# Altium PCB Board2.PcbDoc
Units mil, origin at the board's own origin, x right, y up, seen from the top; angles counter-clockwise.
Board outline 3500 x 3500 mil, 2 copper layers (Top Layer, Bottom Layer); 50 components, 31 nets, 162 pads, 34 vias.
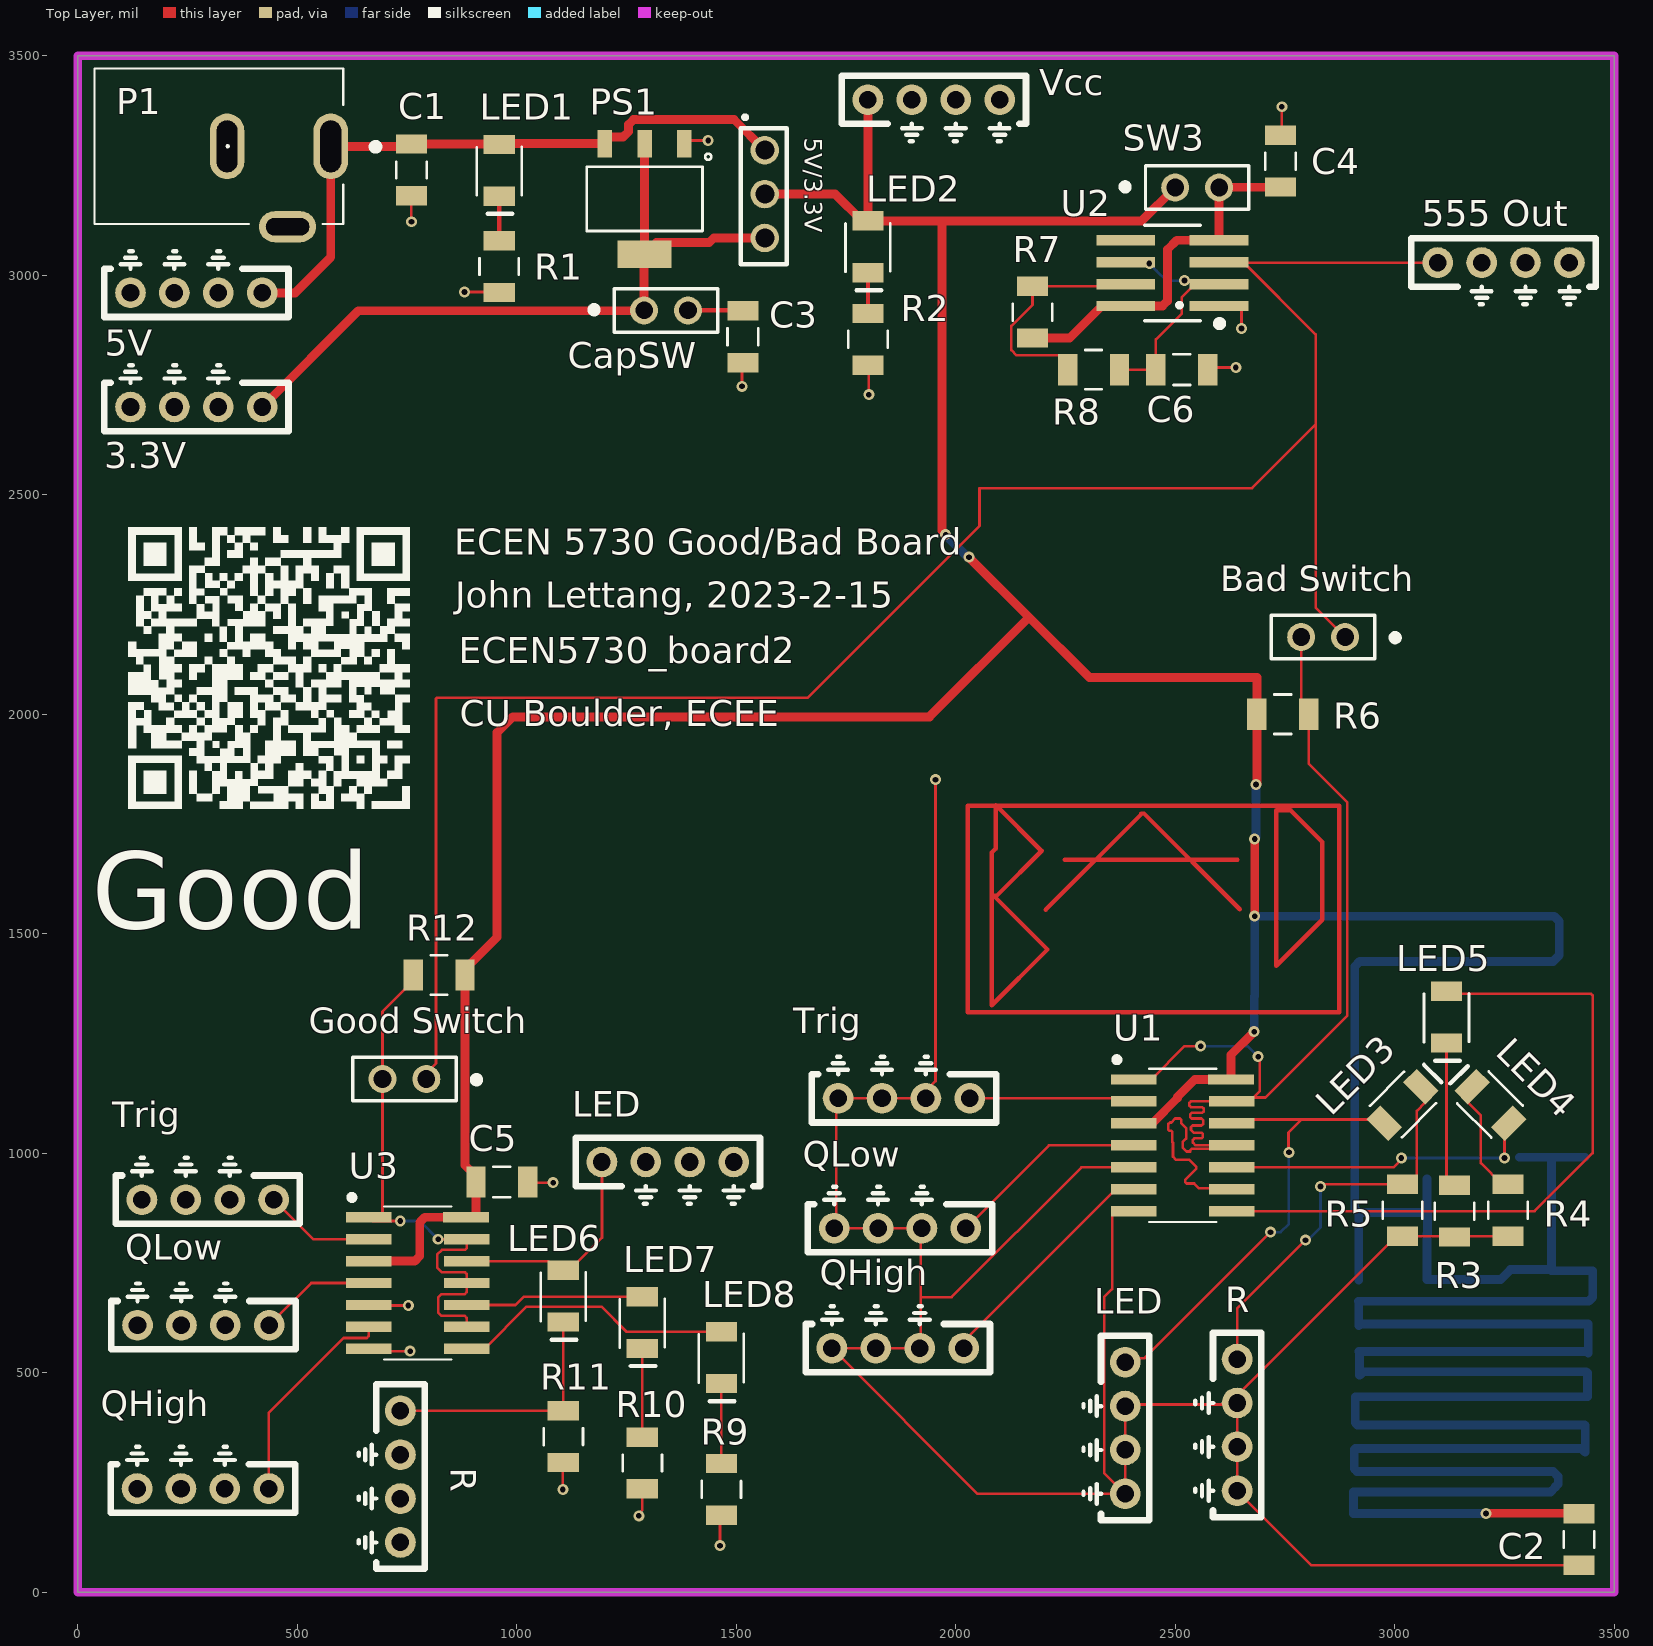
[diagram p0: Top Layer view]
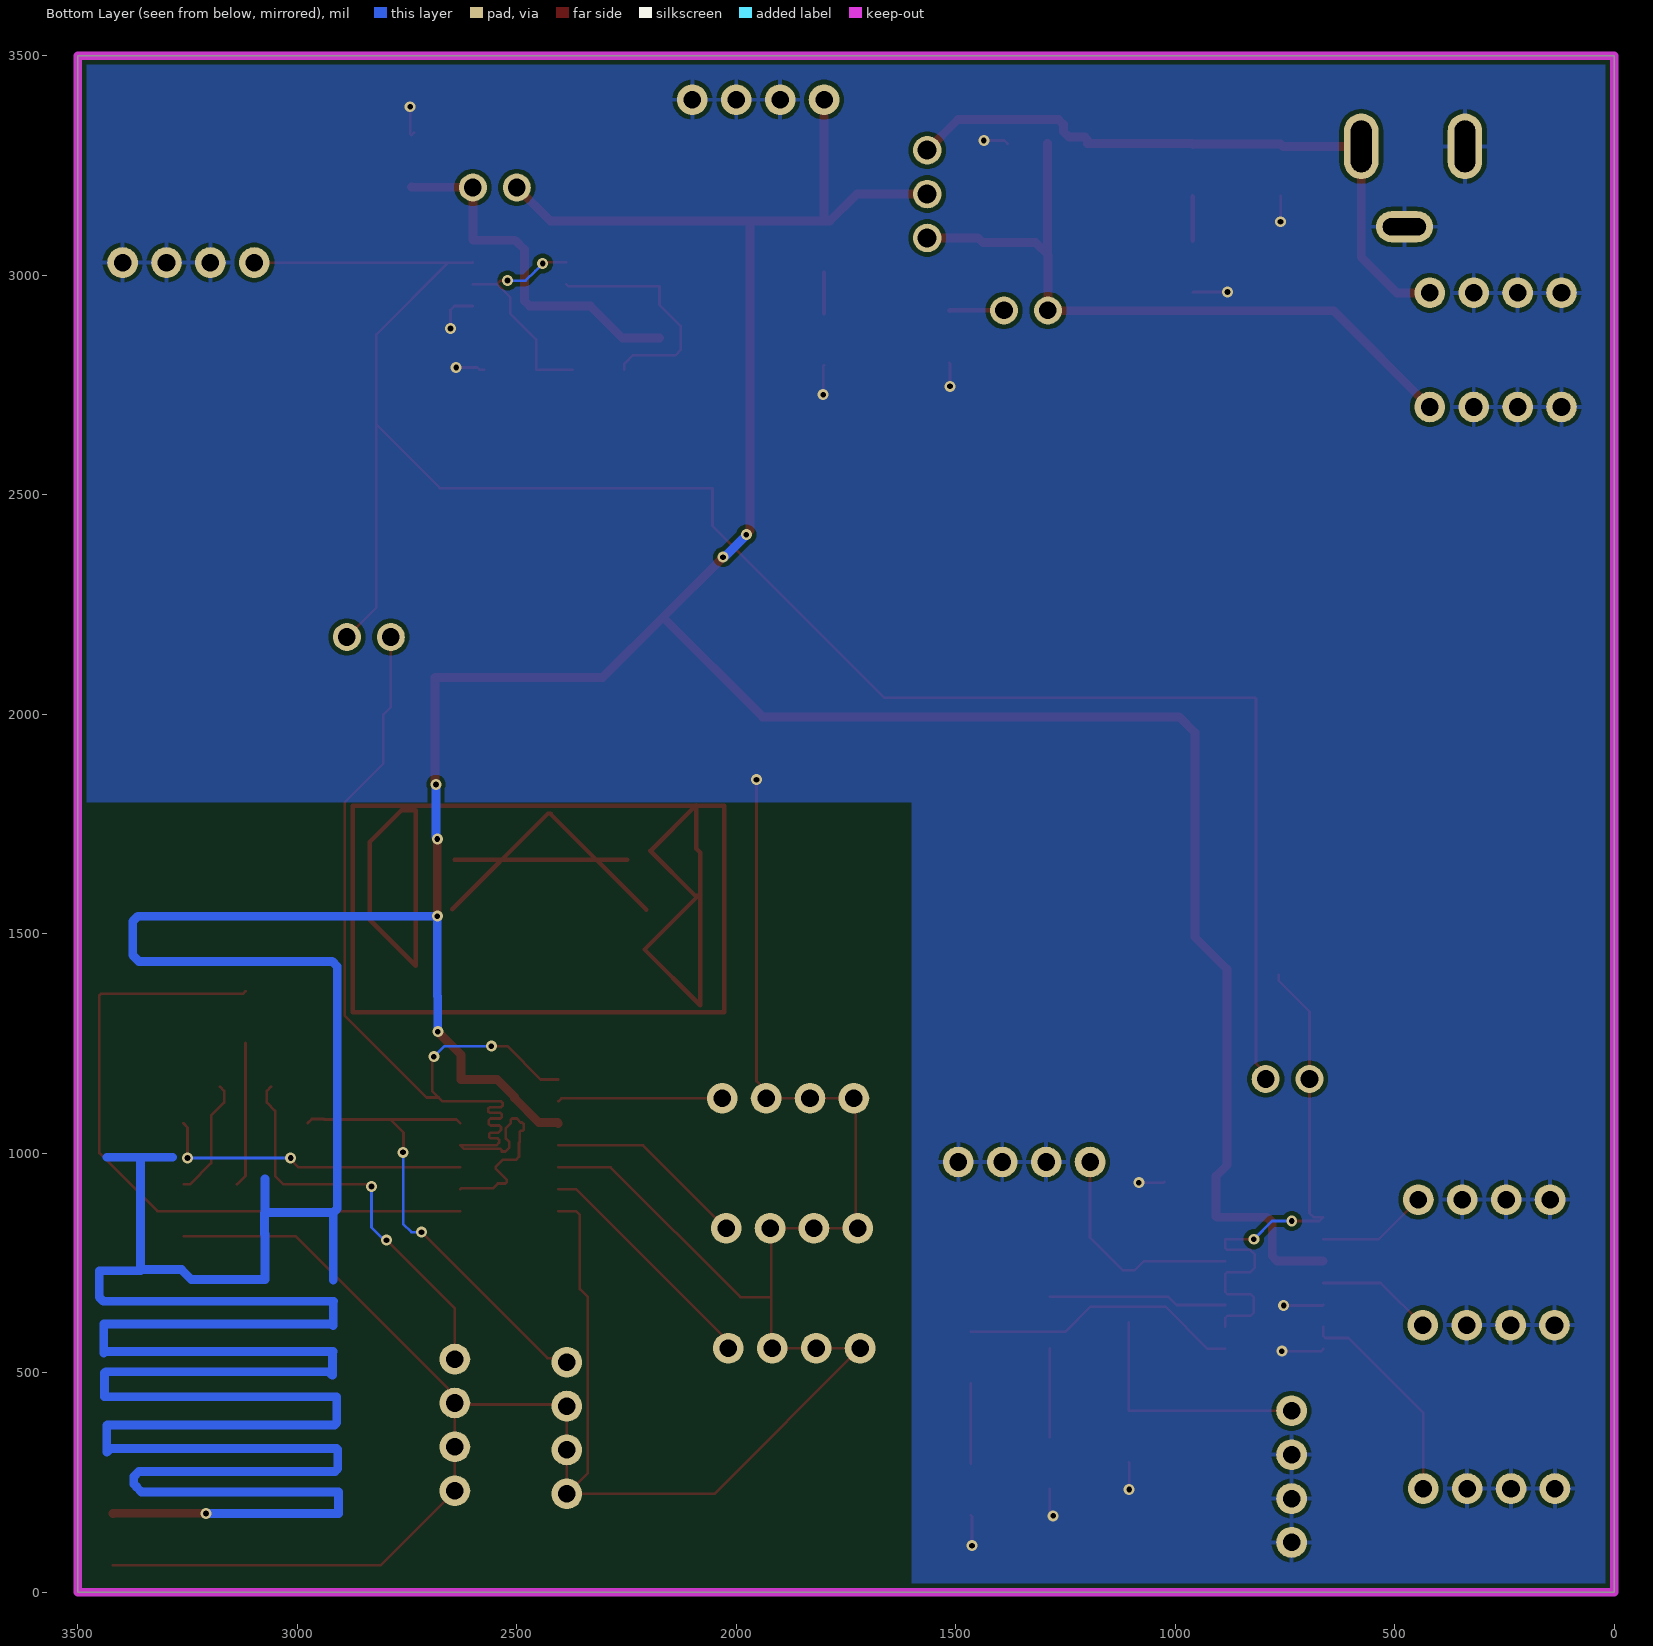
[diagram p1: Bottom Layer view, seen from below]
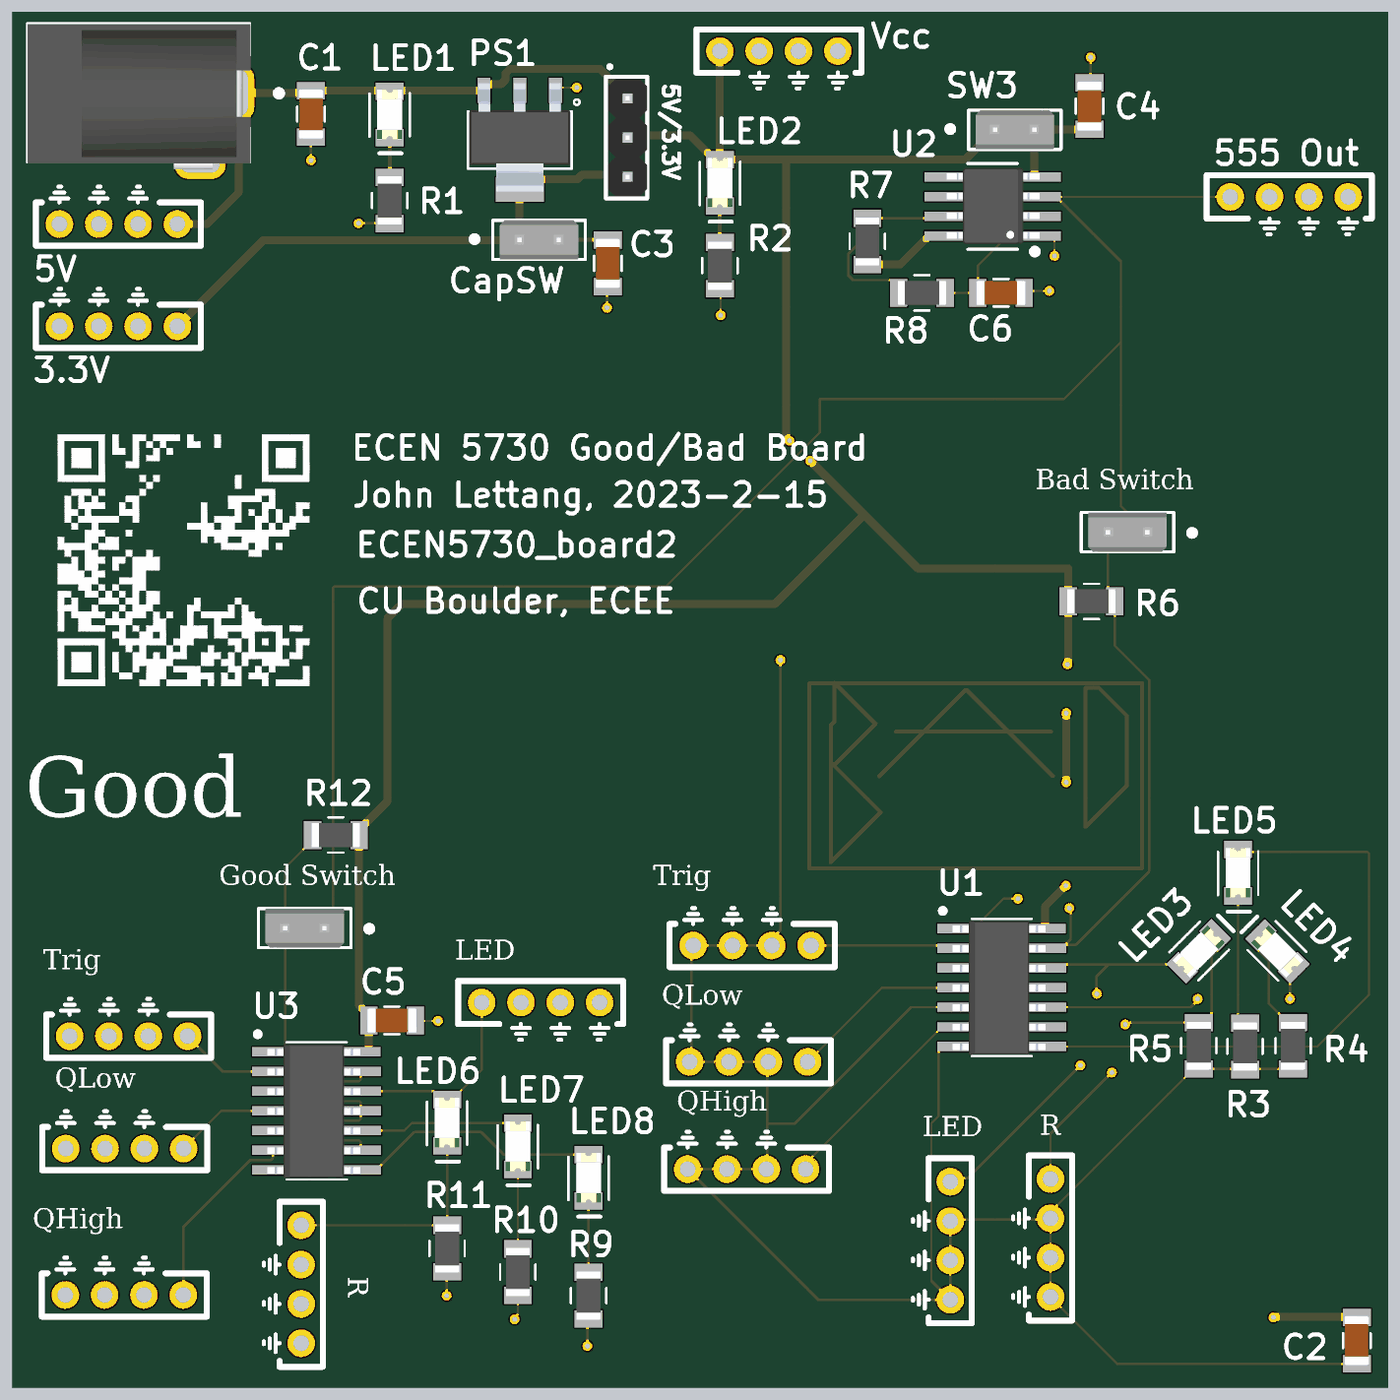
[diagram p2: 3D render of the assembled board from above, using the file's embedded part models]

## Layer stack, top to bottom
Top Solder: solder mask 0.4, Solder Resist, Dk 3.5
Top Layer: signal copper 1.4
Dielectric 1: dielectric 12.6, FR-4, Dk 4.8
Bottom Layer: signal copper 1.4
Bottom Solder: solder mask 0.4, Solder Resist, Dk 3.5

## Board outline
0,0 3500,0 3500,3500 0,3500

## Design rules (kind name [scope] priority, off if disabled: settings)
BoardOutlineClearance [All] p1: gap=10 ignorepadtopadclearanceinfootprint=FALSE except(0: Arc-SplitContinuation Track-SplitContinuation SMDPad-SplitContinuation THPad-SplitContinuation Via-SplitContinuation Fill-SplitContinuation Poly-SplitContinuation Region-SplitContinuation Text-SplitContinuation)
Clearance Clearance_1 [All] p1: gap=10 ignorepadtopadclearanceinfootprint=FALSE except(0: Arc-Hole Track-Hole SMDPad-Hole THPad-Hole Via-Hole Fill-Hole Poly-Hole Region-Hole Text-Hole)
Clearance [All] p2: gap=10 ignorepadtopadclearanceinfootprint=FALSE except(0: Arc-Hole Track-Hole SMDPad-Hole THPad-Hole Via-Hole Fill-Hole Poly-Hole Region-Hole Text-Hole)
PlaneConnect [All] p1: pad.planeconnectstyle=Direct pad.reliefexpansion=20 pad.reliefentries=4 pad.reliefconductorwidth=10 pad.reliefairgap=10 via.planeconnectstyle=Relief via.reliefexpansion=20 via.reliefentries=4 via.reliefconductorwidth=10 via.reliefairgap=10
PolygonConnect [All] p1: thpad.connectstyle=Relief thpad.reliefconductorwidth=10 thpad.reliefentries=4 thpad.polygonreliefangle="90 Angle" thpad.airgapwidth=10 smdpad.connectstyle=Direct smdpad.reliefconductorwidth=10 smdpad.reliefentries=4 smdpad.polygonreliefangle="90 Angle" smdpad.airgapwidth=10 via.connectstyle=Direct via.reliefconductorwidth=10 via.reliefentries=4 via.polygonreliefangle="90 Angle" via.airgapwidth=10
RoutingVias [All] p1: holewidth=13 width=25 viastyle="Through Hole" minholewidth=13 minwidth=25 maxholewidth=28 maxwidth=80
SolderMaskExpansion [All] p1: expansion=4 istentingtop=FALSE
Width "Schematic Width Constraint_4" [InNet('+5')] p1: maxlimit=100 minlimit=10 preferedwidth=20 minimp=50.000000 maximp=50.000000 favimp=50.000000
Width "Schematic Width Constraint_3" [InNet('+3.3')] p2: maxlimit=100 minlimit=10 preferedwidth=20 minimp=50.000000 maximp=50.000000 favimp=50.000000
Width "Schematic Width Constraint_2" [InNet('NetC3_2')] p3: maxlimit=100 minlimit=10 preferedwidth=20 minimp=50.000000 maximp=50.000000 favimp=50.000000
Width "Schematic Width Constraint_1" [InNet('5V 555')] p4: maxlimit=100 minlimit=10 preferedwidth=20 minimp=50.000000 maximp=50.000000 favimp=50.000000
Width "Schematic Width Constraint" [InNet('Vcc')] p5: maxlimit=100 minlimit=10 preferedwidth=20 minimp=50.000000 maximp=50.000000 favimp=50.000000
Width [All] p6: maxlimit=20 minlimit=6 preferedwidth=6 minimp=50.000000 maximp=50.000000 favimp=50.000000
29 further rules are at their usual default settings.

## Classes and differential pairs
component class Board2: 3.3V 5V/3.3V "555 Out" "Bad Switch" C1 C2 C3 C4 C5 C6 CapSW "Good Switch" LED LED1 LED2 LED3 LED4 LED5 LED6 LED7 LED8 P1 PS1 QHigh QLow R R1 R2 R3 R4 R5 R6 R7 R8 R9 R10 R11 R12 SW3 Trig U1 U2 U3 Vcc

## Components (designator, comment, footprint, x,y, rotation, side; value= is the part's Value field where it differs from the comment)
3.3V "5V" TP10x_Probe 270,2960 r180 top (schematic designator TP2)
5V "3.3V" TP10x_Probe 270,2700 r180 top (schematic designator TP6)
5V/3.3V "PREC003SAAN-RC" 3_PIN_100mil 1565,3285 r270 top value="CONN HEADER VERT 3POS 2.54MM" (schematic designator SW1)
"555 Out" "TP 555 Out" TP10x_Probe 3248,3029 r0 top (schematic designator TP12)
"Bad Switch" "SW" 2Pin-Header-Conn 2887,2176 r180 top (schematic designator SW4)
C1 "22uF" 1206_Passive_Capacitor 760,3240 r90 top
C2 "22uF" 1206_Passive_Capacitor 3420,120 r270 top
C3 "22uF" 1206_Passive_Capacitor 1515,2860 r90 top
C4 "22uF" 1206_Passive_Capacitor 2740,3260 r270 top
C5 "22uF" 1206_Passive_Capacitor 966,934.28 r0 top
C6 "1uF" 1206_Passive_Capacitor 2515,2785 r180 top
CapSW "SW_2Pin_100mil_Switch" 2Pin-Header-Conn 1290,2920 r0 top (schematic designator SW2)
"Good Switch" "SW" 2Pin-Header-Conn 794,1169 r180 top (schematic designator SW5)
LED "10x Probe TP" TP10x_Probe 1344,980 r0 top (schematic designator TP13)
LED "10x Probe TP" TP10x_Probe 2386,374 r270 top (schematic designator TP7)
LED1 "Red" LED_1206 960,3239 r270 top
LED2 "Red" LED_1206 1800,3065 r270 top
LED3 "Blue" LED_1206 3018,1110 r45 top
LED4 "Blue" LED_1206 3218,1110 r135 top
LED5 "Blue" LED_1206 3118,1310 r270 top
LED6 "Blue" LED_1206 1106,674.28 r270 top
LED7 "Blue" LED_1206 1286,614.28 r270 top
LED8 "Blue" LED_1206 1466,534.28 r270 top
P1 "Power Jack" Power_Jack 576.22,3293.7 r180 top value="CONN PWR JACK 2X5.5MM SOLDER"
PS1 "AMS1117-3.3" LDO 1291,3174 r180 top value="IC REG LINEAR 3.3V 800MA SOT223"
QHigh "10x Probe TP" TP10x_Probe 285,236 r180 top (schematic designator TP11)
QHigh "10x Probe TP" TP10x_Probe 1868,556 r180 top (schematic designator TP5)
QLow "10x Probe TP" TP10x_Probe 286,608.28 r180 top (schematic designator TP10)
QLow "10x Probe TP" TP10x_Probe 1873,829 r180 top (schematic designator TP3)
R "10x Probe TP" TP10x_Probe 735,263.28 r270 top (schematic designator TP15)
R "10x Probe TP" TP10x_Probe 2641,381 r270 top (schematic designator TP8)
R1 "1k" 1206_Passive_Resitor 960,3020 r90 top value="1K Ohm"
R2 "1k" 1206_Passive_Resitor 1800,2854 r90 top value="1K Ohm"
R3 "47 Ohms" 1206_Passive_Resitor 3136,868 r90 top value=47Ohm
R4 "47 Ohms" 1206_Passive_Resitor 3258,870 r90 top value=47Ohm
R5 "47 Ohms" 1206_Passive_Resitor 3018,870 r90 top value=47Ohm
R6 "10k" 1206_Passive_Resitor 2745,2000 r180 top value=10KOhm
R7 "1k" 1206_Passive_Resitor 2175,2916 r270 top value="1K Ohm"
R8 "1k" 1206_Passive_Resitor 2314,2785 r180 top value="1K Ohm"
R9 "47 Ohms" 1206_Passive_Resitor 1466,234.28 r90 top value=47Ohm
R10 "47 Ohms" 1206_Passive_Resitor 1286,294.28 r90 top value=47Ohm
R11 "47 Ohms" 1206_Passive_Resitor 1106,354.28 r90 top value=47Ohm
R12 "10k" 1206_Passive_Resitor 823,1406 r0 top value=10KOhm
SW3 "SW 555" 2Pin-Header-Conn 2500,3200 r0 top
Trig "10x Probe TP" TP10x_Probe 296,894.28 r180 top (schematic designator TP9)
Trig "10x Probe TP" TP10x_Probe 1882,1125 r180 top (schematic designator TP1)
U1 "SN74AHC14DR" HEX_74AC14 2517,1018 r0 top
U2 "NE555DR" TS555IDTTR 2493.7,3005 r180 top
U3 "SN74AHC14DR" HEX_74AC14 774.35,704.28 r0 top
Vcc "Vcc" TP10x_Probe 1950,3400 r0 top (schematic designator TP4)

## Footprints (in the part's own frame and the unit in brackets; to place one, negate y for a bottom-side part, rotate by r counter-clockwise, add the part's x,y. Pads: shape width x height; smd on the part's side, far side on the other; paste and mask are expansions set on the pad)
2Pin-Header-Conn [mm]
  round 1.62 hole 1.02: 1(0,0) 2(2.54,0)
  silkscreen extent -3.03,-1.27 4.26,1.26, body extent -1.27,-1.27 3.81,1.27, height 8.13
3_PIN_100mil [mm]
  round 1.65 hole 1.1: 1(0,0) 2(2.54,0) 3(5.08,0)
  silkscreen extent -2,-1.4 6.6,1.27, body extent -1.14,-1.27 6.48,1.27, height 8.38
1206_Passive_Capacitor [mil]
  rect 44x71 smd: 1(-59,0) 2(59,0)
  silkscreen extent -19,-35 19,35, body extent -63,-31 63,32, height 50
1206_Passive_Resitor [mil]
  rect 44x71 smd: 1(-59,0) 2(59,0)
  silkscreen extent -19,-45 19,45, body extent -61,-31 61,31, height 26
HEX_74AC14 [mm]
  rect 2.65x0.6 smd: 1(-2.836,3.81) 2(-2.836,2.54) 3(-2.836,1.27) 4(-2.836,0) 5(-2.836,-1.27) 6(-2.836,-2.54) 7(-2.836,-3.81) 8(2.836,-3.81) 9(2.836,-2.54) 10(2.836,-1.27) 11(2.836,0) 12(2.836,1.27) 13(2.836,2.54) 14(2.794,3.81)
  silkscreen extent -3.94,-4.43 1.95,5.08, body extent -3.18,-4.35 2.82,4.3, height 1.75
LDO [mil]
  rect 33x63 smd: 1(-91,-126) 2(0,-126) 3(91,-126)
  rect 122x63 smd: 4(0,126)
  silkscreen extent -152,-103 132,73, body extent -128,-144 128,132, height 73
LED_1206 [mil]
  rect 44x71 smd: 1(-59,0) 2(59,0)
  silkscreen extent -54,-51 99,51, body extent -63,-31 63,31, height 28
Power_Jack [mm]
  oval 2x3.8 hole 1.2 slot 3 at 90 deg: 1(0,0) 2(6,0)
  oval 3.3x1.8 hole 1 slot 2.5 at 0 deg: 3(2.5,4.65)
  silkscreen extent -2.79,-4.5 13.68,4.5, body extent -0.76,-4.45 13.64,4.95, height 11.49
TP10x_Probe [mil] "Small Probs footprint"
  round 70 hole 40: 1(-150,0) 2(-50,0) 2(50,0) 2(150,0)
  silkscreen extent -210,-95 210,55
TS555IDTTR [mm] "IC OSC Single Timer 2.7MHz 8SOIC"
  rect 3.4x0.6 smd: 1(-2.7,1.905) 2(-2.7,0.635) 3(-2.7,-0.635) 4(-2.7,-1.905) 5(2.7,-1.905) 6(2.7,-0.635) 7(2.7,0.635) 8(2.7,1.905)
  silkscreen extent -2.85,-2.77 1.6,3.05, body extent -3.03,-2.48 2.96,2.43, height 1.75

## Part data
3.3V 5V "555 Out" LED LED QHigh QHigh QLow QLow R R Trig Trig Vcc: library part TP_10x_Probe, "Test Point 300 mil centers"
5V/3.3V: library part SW_3Pin_100mil_Switch, "Connector Header Through Hole 3 position 0.100\" (2.54mm)", LCSC Part#=C49257, Digikey Link=https://www.digikey.com/product-detail/en/PREC003SAAN-RC/S1012EC-03-ND/2774851/?itemSeq=304982371, MFR Part #=PREC003SAAN-RC, Type=Extended
"Bad Switch" "Good Switch" SW3: library part SW_2Pin_100mil_Switch, "2Pin Header", LCSC Part#=C124375, Type=Extended
C1 C2 C3 C4 C5: library part C_22uF_1206, "22uF ±10% 25V X5R 1206 Multilayer Ceramic Capacitors MLCC - SMD/SMT RoHS", LCSC Part#=C12891, MFR Part #=CL31A226KAHNNNE, Datasheet=https://datasheet.lcsc.com/lcsc/1811031514_Samsung-Electro-Mechanics-CL31A226KAHNNNE_C12891.pdf, Type=basic
C6: library part C_1uF_1206, "MULTILAYER CERAMIC CAPACITORS MLCC - SMD/SMT 1UF 50V 1206 ROHS", LCSC Part#=C1848, MFR Part #=CL31B105KBHNNNE, Digikey Link=https://www.digikey.com/product-detail/en/C1206C105M4RACTU/399-8150-1-ND/3471873/?itemSeq=304982366, Type=Basic
CapSW: "2Pin Header", LCSC Part#=C124375, Type=Extended
LED1 LED2: library part LED_RED_1206, "Red 621~631nm 1206 Light Emitting Diodes (LED) RoHS", LCSC Part#=C93133, MFR Part #=15-21/R6C-FQ1R1B/2T, Datasheet=https://datasheet.lcsc.com/szlcsc/1811151241_Everlight-Elec-15-21-R6C-FQ1R1B-2T_C93133.pdf, Type=Extended
LED3 LED4 LED5 LED6 LED7 LED8: library part LED_BLUE_1206, "blue 1206  Light Emitting Diodes (LED) ROHS", LCSC Part#=C130717, MFR Part #=NCD1206B1, Datasheet=https://datasheet.lcsc.com/lcsc/2008201033_Foshan-NationStar-Optoelectronics-NCD1206B1_C130717.pdf, Type=Extended
P1: library part "P_Power Jack", "Power Barrel Connector Jack 2.10mm ID (0.083\"), 5.50mm OD (0.217\") Through Hole, Right Angle", LCSC Part#=C136744, MFR Part #=PJ-102A, Digikey Link=https://www.digikey.com/product-detail/en/PJ-102A/CP-102A-ND/275425/?itemSeq=304982367, Type=Extended
PS1: library part PS_AMS_LDO_3v3, "LOW DROPOUT REGULATORS(LDO) POSITIVE FIXED 1.3V @ 800MA 15V 3.3V 1A SOT-223 ROHS", LCSC Part#=C6186, MFR Part #=AMS1117-3.3, Type=Basic
R1 R2 R7 R8: library part R_1K_1206, "CHIP RESISTOR - SURFACE MOUNT 1KOHMS ±1% 1/4W 1206 ROHS", LCSC Part#=C4410, MFR Part #=RNCP1206FTD1K00CT, Digikey Link=https://www.digikey.com/product-detail/en/RNCP1206FTD1K00/RNCP1206FTD1K00CT-ND/2240675/?itemSeq=304982373, Type=Basic
R3 R4 R5 R9 R10 R11: library part R_47Ohm_1206, "47Ω ±5% 0.25W ±200ppm/℃ 1206 Chip Resistor - Surface Mount RoHS", LCSC Part#=C25384, MFR Part #=1206W4J0470T5E, Datasheet=https://datasheet.lcsc.com/lcsc/1811101020_UNI-ROYAL-Uniroyal-Elec-1206W4J0470T5E_C25384.pdf, Type=Extended
R6 R12: library part R_10KOhm_1206, "10 kOhms ±5% 0.25W, 1/4W Chip Resistor 1206 (3216 Metric) Automotive AEC-Q200 Thick Film", LCSC Part#=C17902, MFR Part #=RMCF1206FT10K0, Digikey Link=https://www.digikey.com/en/products/detail/stackpole-electronics-inc/RMCF1206FT10K0/1759669, Type=Basic
U1 U3: library part U_74_AHC_Hex, "Inverter IC 6 Channel Schmitt Trigger 14-SOIC", LCSC Part#=C6942, Datasheet=https://datasheet.lcsc.com/szlcsc/ON-Semicon-ON-74AC14SCX_C5482.pdf, MFR Part #=SN74AHC14DR, Type=Extended
U2: library part U_555_Slow, "555 Timer SOIC-8_150MIL ROHS 150ns Rise Time", LCSC Part#=C7593, Digikey Link=https://www.digikey.com/product-detail/en/texas-instruments/NE555DR/296-6501-1-ND/372490, MFR Part #=NE555DR, Type=Basic

## Via types
v1: diameter 25, hole 13, Top Layer to Bottom Layer, 34 vias

## Nets (pads, with @x,y where several pads share a name; then routed paths per layer and width w, separated by ;. In a path a pad name is that pad's centre, name@x,y a point inside that pad or via, vN(x,y) a via of type N, cw(c..) or ccw(c..) an arc to the next point about the centre after c; other vN are vias at no path point)
"5V 555": C4.2 R7.2 SW3.2 U2.4 U2.8 | length 846.4
  Top Layer w20: R7.2 2259.28,2857 2332.28,2930 2470.78,2930 2482.5,2941.72 2482.5,3058.78 2503.72,3080 U2.4 SW3.2 2600.5,3200.5 2739.5,3200.5 C4.2
555_Bout: "Bad Switch.2" R6.1 U1.1 U1.9 U1.11 U1.13 | length 2631
  Top Layer w6: U1.1 2445.7,1168 2521.7,1244 v1(2558,1244) ; U1.9 2626.65,920 2554,920 2543,931 2526,931 2522.49,934.51 2522.49,939.49 2547.51,964.51 2547.51,969.49 2532,985 2502,985 2495,992 2495,1024 2493.46,1025.54 2493.46,1048.54 2491,1051 2487.51,1051 2484,1054.51 2484,1066 2488,1070 2491,1070 2500,1079 2510.49,1079 2514,1075.49 2514,1068 2525,1057 2525,1033 2517,1025 2517,1013 2526,1004 2534,1004 2534,1006.49 2537.51,1010 2620.65,1010 U1.11 2546,1018 2540,1024 2540,1030.49 2543.51,1034 2559.49,1034 2563,1037.51 2563,1043.49 2559.49,1047 2542,1047 2536,1053 2536,1059.49 2539.51,1063 2559.97,1063 2563.49,1066.51 2563.49,1075.49 2559.97,1079 2537.51,1079 2534,1082.51 2534,1088.49 2537.51,1092 2561.49,1092 2565,1095.51 2565,1101.49 2561.49,1105 2535.51,1105 2532,1108.51 2532,1114.49 2535.51,1118 U1.13 2669.01,1118 U1.13@2677.82,1126.81 ; v1(2689,1220) 2692.17,1216.83 2692.17,1141.16 U1.13@2677.82,1126.81 ; 2787,2176 2787,2017 R6.1 2804,1887.46 2892,1799.46 2892,1313.54 2705.27,1126.81 U1.13@2677.82,1126.81
  Bottom Layer w6: v1(2558,1244) 2665,1244 v1(2689,1220)
555_Gout: "Good Switch.2" R12.1 U3.1 U3.9 U3.11 U3.13 | length 1285.6
  Top Layer w6: v1(734.53,845.47) 671.5,845.47 U3.1 685.19,854.28 694,863.1 694,1169 694,1322.5 764,1392.5 R12.1 ; v1(821,804) 885.72,804 U3.13 886,783.47 882.31,779.78 829.14,779.78 818.5,769.15 818.5,739.42 829.14,728.78 882.31,728.78 886,725.1 U3.11 886,683.47 881.62,679.1 828.45,679.1 820.83,671.48 820.83,637.09 828.45,629.47 881.62,629.47 886,625.1 U3.9
  Bottom Layer w6: v1(734.53,845.47) 779.53,845.47 v1(821,804)
555_Out: "555 Out.1" "Bad Switch.1" "Good Switch.1" U2.3 | length 4635.7
  Top Layer w6: 794,1169 794,1182.77 816.03,1204.8 816.03,2035.51 818.51,2038 1663,2038 2054,2429 2054,2515 2675,2515 2820,2660 ; U2.3 2601,3029 U2.3@2656.12,3029 ; 2887,2176 2820,2243 2820,2660 ; 3098,3029 U2.3@2656.12,3029 ; U2.3@2656.12,3029 2820,2865.12 2820,2660
+3.3: 5V.1 5V/3.3V.3 CapSW.1 PS1.2 PS1.4 | length 1630.9
  Top Layer w20: 5V.1 639,2919 1289,2919 CapSW.1 1290,3047 PS1.4 ; PS1.2 PS1.4 ; 5V/3.3V.3 1448.56,3085 1438.06,3074.5 1317.5,3074.5 PS1.4
+5: 3.3V.1 5V/3.3V.1 C1.2 LED1.1 P1.1 PS1.3 | length 1501
  Top Layer w20: 3.3V.1 495,2960 576.22,3041.22 P1.1 754.7,3293.7 C1.2 959,3299 LED1.1 962,3300 PS1.3 1200,3308.76 1206.5,3315.26 1242.78,3315.26 1254.5,3326.98 1254.5,3343.28 1266.22,3355 1495,3355 5V/3.3V.1
D: R7.1 R8.2 U2.7 | length 534.8
  Top Layer w6: R8.2 2255,2798.5 2236,2817.5 2138.62,2817.5 2126.5,2829.62 2126.5,2884.38 2175,2932.88 R7.1 2382.4,2975 U2.7
GND: 3.3V.2 5V.2 "555 Out.2" C1.1 C2.2 C3.1 C4.1 C5.2 C6.1 LED.2 P1.2 P1.3 PS1.1 QHigh.2 QLow.2 R1.1 R2.1 R3.1 R4.1 R5.1 R9.1 R10.1 R11.1 R.2 Trig.2 U1.5 U1.7 U2.1 U3.5 U3.7 Vcc.2 | length 7327.2
  Top Layer w6: U3.7 667.98,549 v1(757,549) ; U3.5 663.98,653 v1(753,653) ; v1(760,3122) C1.1 ; v1(881,2962) 959,2962 R1.1 ; C5.2 1026.28,933 v1(1083,933) ; v1(1105,234) 1105,294.28 R11.1 ; v1(1278,174) 1278,179.14 1286,187.14 R10.1 ; PS1.1 1389,3307 v1(1436,3307) ; v1(1463,106) 1463,172.28 R9.1 ; v1(1513,2747) 1513,2799 C3.1 ; R2.1 1802,2793 v1(1802,2728) ; QLow.2@1923,829 QLow.2@1921.75,827.75 ; v1(1954,1851) 1954,1164.32 1932,1142.32 1932,1125 1832,1125 1732,1125 1727.5,1120.5 1727.5,833.5 1723,829 1823,829 1920.5,829 QLow.2@1921.75,827.75 ; U1.7 2364.99,868 2356.18,859.19 2356.18,690.74 2338,672.56 2338,272 LED.2@2386,224 ; U1.5 2286.34,968 1990.34,672 1920.5,672 ; C6.1 2585,2785 2590,2790 v1(2638,2790) ; U2.1 2642.19,2930 2651,2921.19 v1(2651,2879) ; C4.1@2734,3325 C4.1 2743,3322 v1(2743,3384) ; R4.1 R5.1 3004.5,811 2641,447.5 R.2@2641,431 ; C2.2 2811,61 2641,231 2641,331 R.2@2641,431 ; 1920.5,672 1920.5,826.5 QLow.2@1921.75,827.75 ; 1920.5,672 1920.5,558.5 1918,556 1818,556 1718,556 2050,224 LED.2@2386,224 ; LED.2@2386,224 2386,324 2386,424 2389.5,427.5 2637.5,427.5 R.2@2641,431
LED_bad: LED3.1 LED.1@2386,524 U1.12 | length 1109.8
  Top Layer w6: LED.1@2386,524 2395,533 2430,533 v1(2717,820) ; U1.12 2637.46,1076.81 2788.16,1076.81 ; v1(2759,1002) 2758,1003 2758,1046.65 2788.16,1076.81 ; LED3.1 2966.73,1077.83 2939.86,1077.83 2938.85,1076.81 2788.16,1076.81
  Bottom Layer w6: v1(2717,820) 2740,820 2759,839 v1(2759,1002)
LED_good: LED6.1 LED.1@1194,980 U3.12 | length 519.8
  Top Layer w6: U3.12 962.72,754.28 1071.5,754.28 1092.5,733.28 LED6.1 1119.5,733.28 1194,807.78 LED.1@1194,980
NetC3_2: C3.2 CapSW.2 | length 125.4
  Top Layer w10: CapSW.2 1514,2920 C3.2
NetLED1_2: LED1.2 R1.2 | length 101
  Top Layer w10: R1.2 LED1.2
NetLED2_2: LED2.2 R2.2 | length 93
  Top Layer w10: R2.2 LED2.2
NetLED4_1: LED4.1 U1.10 | length 715.5
  Top Layer w6: U1.10 2997.59,968 3015,985.41 v1(3015,989) ; v1(3250.09,989.09) 3250.17,989.17 3250.17,1058.73 LED4.1
  Bottom Layer w6: v1(3015,989) v1(3015,989) 3250.04,989.04 v1(3250.09,989.09)
NetLED4_2: LED4.2 R4.2 | length 272.4
  Top Layer w6: LED4.2 3166.73,1142.17 3166.73,1115.3 3196.12,1085.92 3196.12,977.38 3244.5,929 R4.2
NetLED5_1: LED5.1 U1.8 | length 1573.4
  Top Layer w6: U1.8 3319,868 3451,1000 3451,1359.49 3447.49,1363 3124,1363 LED5.1
NetLED5_2: LED5.2 R3.2 | length 330.9
  Top Layer w6: LED5.2 3118,948 3137,929 R3.2@3138,929
NetLED7_1: LED7.1 U3.10 | length 407.9
  Top Layer w6: U3.10 997.19,654.28 1016.19,673.28 LED7.1
NetLED7_2: LED7.2 R10.2 | length 202
  Top Layer w6: R10.2 LED7.2
NetLED8_1: LED8.1 U3.8 | length 643.4
  Top Layer w6: U3.8 926.35,554.28 1022.35,650.28 1193,650.28 1250,593.28 LED8.1
NetLED8_2: LED8.2 R9.2 | length 182
  Top Layer w6: R9.2 LED8.2
QHi_bad: QHigh.1@2018,556 U1.6 | length 546.1
  Top Layer w6: QHigh.1@2018,556 2018,571.01 2364.99,918 U1.6
QHi_good: QHigh.1@435,236 U3.6 | length 493.7
  Top Layer w6: QHigh.1@435,236 435,408.95 605.14,579.1 658.32,579.1 662.69,583.47 U3.6
QLo_bad: QLow.1@2023,829 U1.4 | length 460.6
  Top Layer w6: QLow.1@2023,829 2212,1018 U1.4
QLo_good: QLow.1@436,608.28 U3.4 | length 266.5
  Top Layer w6: QLow.1@436,608.28 532,704.28 U3.4
R_bad: LED3.2 R5.2 R.1@2641,531 | length 919.5
  Top Layer w6: R.1@2641,531 2641,646 v1(2797,802) ; v1(2831,924) 2834,927 2840,927 2842,929 R5.2 3031.5,929 3050.5,948 3050.5,1096.54 3069.27,1115.3 3069.27,1142.17 LED3.2
  Bottom Layer w6: v1(2797,802) 2801.99,801.99 2831,831 v1(2831,924)
R_good: LED6.2 R11.2 R.1@735,413.28 | length 573
  Top Layer w6: R.1@735,413.28 R11.2 LED6.2
Trig: C6.2 R8.1 U2.2 U2.6 | length 548.1
  Top Layer w6: R8.1 C6.2 2456,2854.31 2515,2913.31 2515,2950.12 U2.2@2544.88,2980 ; U2.6 2438,3030 v1(2441,3027) ; v1(2521,2988) 2536.88,2988 U2.2@2544.88,2980 ; U2.2 U2.2@2544.88,2980
  Bottom Layer w6: v1(2441,3027) 2457.82,3010.18 2480,2988 v1(2521,2988)
Trig_bad: Trig.1@2032,1125 U1.2 | length 376.2
  Top Layer w6: Trig.1@2032,1125 2398.35,1125 U1.2
Trig_good: Trig.1@446,894.28 U3.2 | length 254
  Top Layer w6: Trig.1@446,894.28 536,804.28 U3.2
Vcc: 5V/3.3V.2 C2.1 C5.1 LED2.1 R6.2 R12.2 SW3.1 U1.3 U1.14 U3.3 U3.14 Vcc.1 | length 15658.3
  Top Layer w20: U3.3 767.28,754.28 779,766 779,842.57 790.72,854.28 U3.14 905.19,854.28 907,856.1 C5.1 907,947.78 882,972.78 R12.2 882,1419.5 954.86,1492.36 954.86,1958.14 990.72,1994 1940,1994 2167,2221 ; 5V/3.3V.2 1725.5,3185 1786.5,3124 LED2.1 ; Vcc.1 LED2.1 ; v1(1977,2409) 1977,2410.35 1969,2418.35 1969,3124 ; v1(2030,2358) 2167,2221 ; U1.3 2407.16,1069.81 2449.42,1069.81 2505.32,1125.71 2505.32,1128.48 2544.83,1168 U1.14 2627,1224 v1(2680,1277) ; SW3.1 2424,3124 1969,3124 ; v1(2681,1540) v1(2681,1716) ; v1(2684,1840) 2684,1841.35 2686,1843.35 R6.2 2686,2084 2304,2084 2167,2221 ; v1(3208,179) 3209.35,179 3210.35,180 3419,180 C2.1 ; LED2.1 1969,3124
  Bottom Layer w20: v1@1977,2408 2027,2358 v1(2030,2358) ; v1(2680,1277) 2680,1357 2681,1358 v1(2681,1540) 3363.28,1540 3375,1528.28 3375,1451 3361,1437 2920.72,1437 2909,1425.28 2909,873.72 2918,864.72 ; v1(2681,1716) 2681,1717.35 2684,1720.35 v1(2684,1840) ; 2906,228 2906,179 v1(3208,179) ; 2907,228 3354.72,228 3366.43,239.72 3366.43,240.43 3372.72,246.72 3372.72,263.28 3361.01,275 2914,275 2908,281 2908,325 2910,327 3426,327 3434,319 3434,327 3434,380 3433,381 2915,381 2910,386 2910,444 2911,445 3439,445 3439,499 3436,502 2928,502 2920,494 2920,502 2920,546 2918,548 3438,548 3441,545 3441,611 2922,611 2918,607 2918,662 2917,663 3442,663 3451,672 3451,732 3357,732 3357,991 ; 2918,711 2918,864.72 ; 3073.72,816 3073.72,712.28 3241.28,712.28 3264,735 3357,735 ; 3073.72,941.72 3073.72,864.72 ; 3075,816 3075,863.43 3073.72,864.72 ; 3284,991 3357,991 ; 3434,991 3357,991 ; 2918,864.72 3073.72,864.72
pads on no net: U2.5
copper on no net: | length 5581.5
  Top Layer w10: 2205,1555 2423,1773 2423,1774 2429,1774 2647,1556 ; 2248,1669 2642,1669 ; 2027,1321 2874,1321 2874,1792 2027,1792 2027,1321 ; 2082,1337 2209,1464 2086,1587 2094,1587 2196,1689 2195,1689 2091,1793 2091,1694 2082,1685 2082,1337 ; 2730,1427 2835,1532 2835,1709 2763,1781 2730,1781 2730,1427

## Polygon pours and split planes (outlines as drawn)
GND on Bottom Layer "GND_L02_P000" (solid, pour order 0): 0,0 1600,0 1600,1800 3500,1800 3500,3500 0,3500

## Keep-outs
Keep-Out Layer:
  lines w20: 0,0 0,3500 ; 0,0 3500,0 ; 0,0 0,3500 ; 0,0 3500,0 ; 0,3500 3500,3500 ; 0,3500 3500,3500 ; 3500,0 3500,3500

## Silkscreen, mask and mechanical layers (free items; w line width, h text height)
Top Overlay:
  drawing of 28 lines, arcs and shapes, not listed
  text "ECEN 5730 Good/Bad Board" at 857,2363 h60
  text "John Lettang, 2023-2-15" at 860,2242.99 h60
  text "ECEN5730_board2" at 868,2116 h60
  text "CU Boulder, ECEE" at 870,1972.99 h60
  text "Good" at 32,1452.88 h300